# Altium PCB ch340.pcbdoc
Units mil, origin at the board's own origin, x right, y up, seen from the top; angles counter-clockwise.
Board outline 3299.6 x 2085 mil, 2 copper layers (Top Layer, Bottom Layer); 21 components, 21 nets, 69 pads, 87 vias.
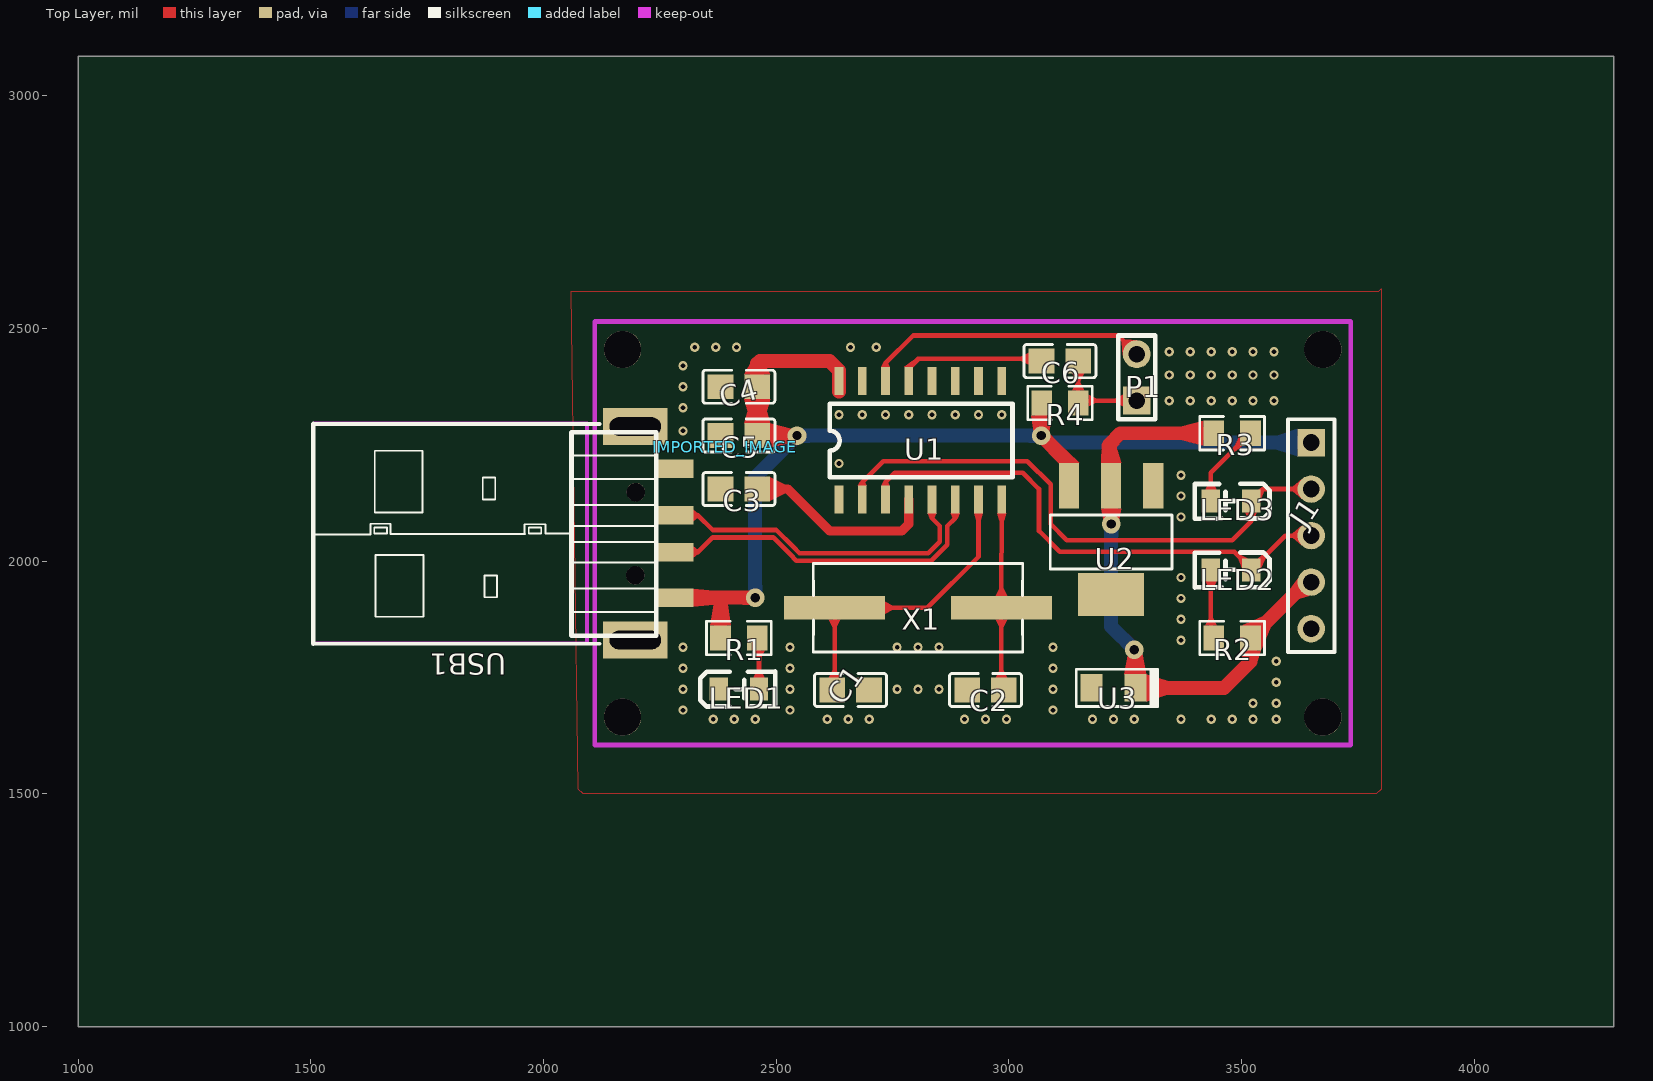
[diagram p0: Top Layer view]
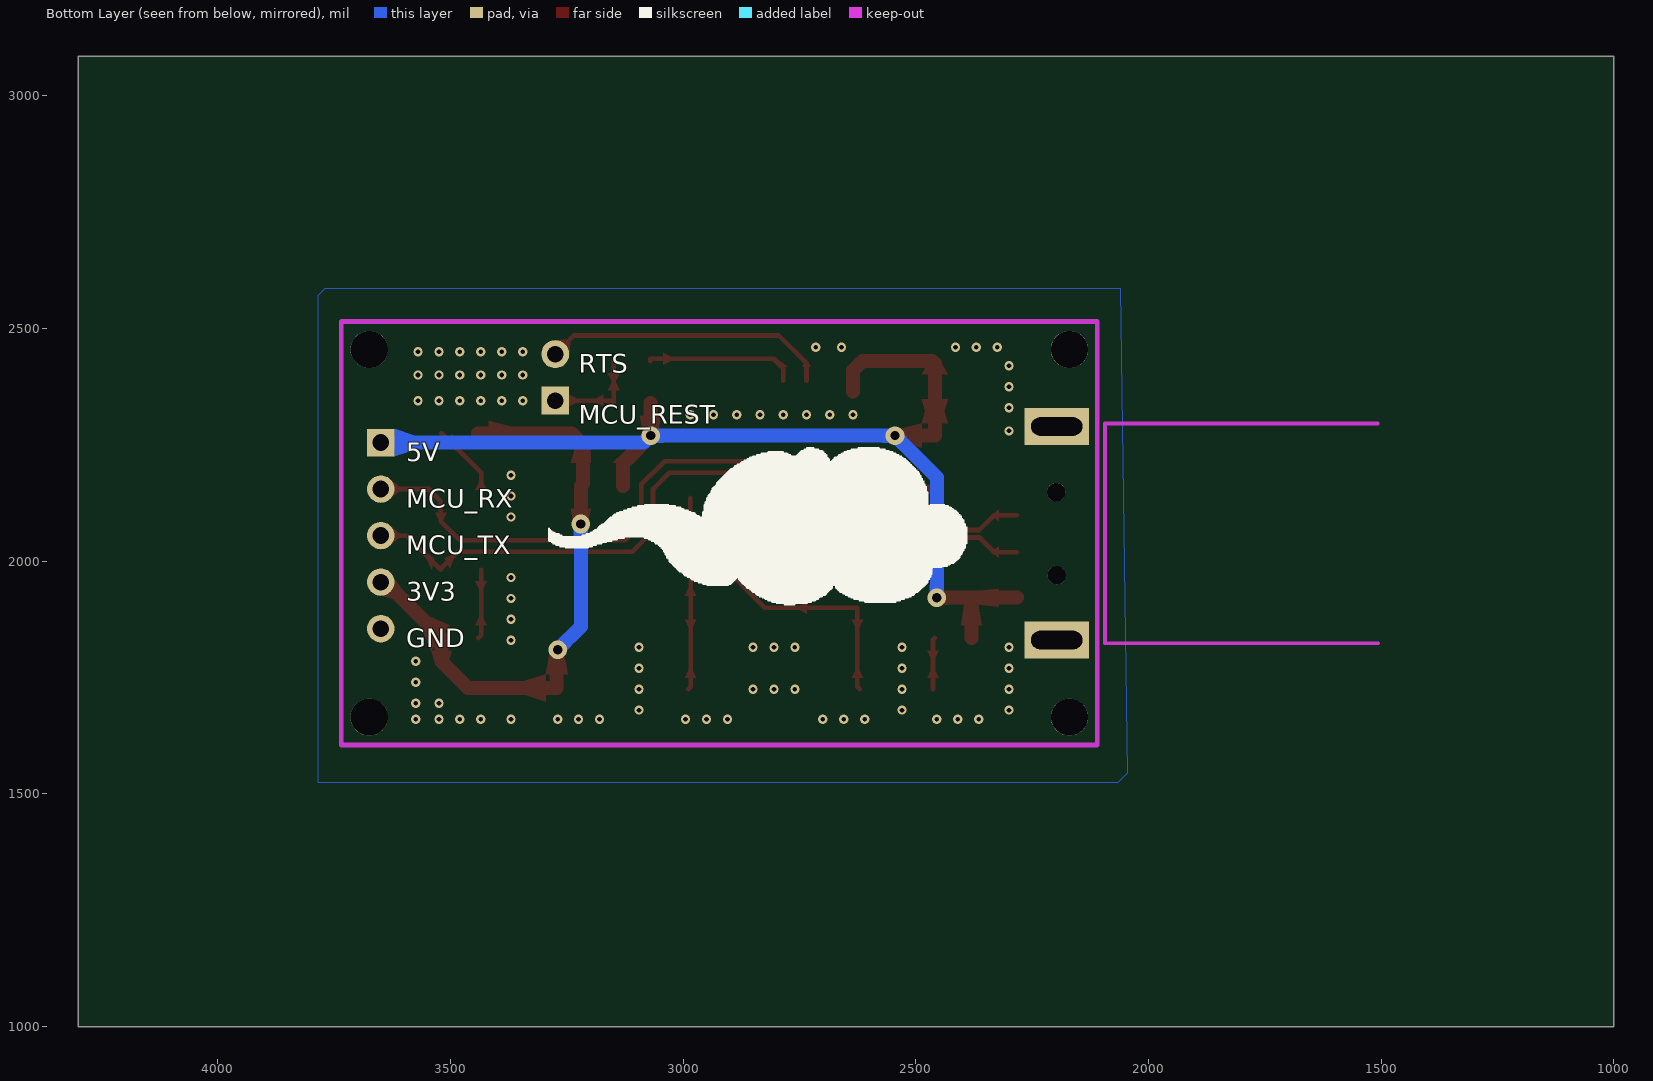
[diagram p1: Bottom Layer view, seen from below]

## Layer stack, top to bottom
Top Layer: signal copper (thickness not stored)
Dielectric: dielectric 12.6, FR-4, Dk 4.8
Bottom Layer: signal copper (thickness not stored)

## Board outline
4299.6,1000 1000,1000 1000,3085 4299.6,3085

## Components (designator, comment, footprint, x,y, rotation, side; value= is the part's Value field where it differs from the comment)
C1 "22p" C0805 2659.6,1723.17 r0 top
C2 "22p" C0805 2949.6,1723.18 r180 top
C3 "0.1u" C0805 2419.6,2155 r180 top
C4 "0.1u" C0805 2419.6,2375 r0 top
C5 "1u" C0805 2419.6,2270 r0 top
C6 "0.1u" C0805 3109.6,2430 r0 top
IMPORTED_IMAGE "IMPORTED_IMAGE" IMPORTED_IMAGE 2389.6,2244.87 r0 top
J1 "HEARDER5" HDR1X5 3649.6,2055 r270 top
LED1 "LED0805" LED0805-RD 2419.6,1725 r0 top
LED2 "LED0805" LED0805-RD 3477.23,1981.37 r180 top
LED3 "LED0805" LED0805-RD 3477.23,2129.03 r180 top
P1 "Header2x1" HEADER2X1 3274.6,2345 r90 top
R1 "1k" R0805 2419.6,1835 r180 top
R2 "750" R0805 3479.6,1835 r0 top
R3 "750" R0805 3479.6,2275 r180 top
R4 "10k" R0805 3109.6,2340 r180 top
U1 "CH340G" SOP16L 2809.6,2260 r90 top
U2 "AMS1117-3.3RG" SOT-223-3_L6.4-W3.5-P2.30-LS7.0-BR 3219.6,2045 r90 top
U3 "22UF" CAP-SMD_L3.2-W1.6-FD-1 3224.6,1727.6 r180 top
USB1 "USB-SMD-A" USB-A-SMD_U-G-04WS-W-01 2239.6,2060 r180 top
X1 "12MHz" HC-49S_L11.4-W4.8 2804.6,1900 r180 top

## Footprints (in the part's own frame and the unit in brackets; to place one, negate y for a bottom-side part, rotate by r counter-clockwise, add the part's x,y. Pads: shape width x height; smd on the part's side, far side on the other; paste and mask are expansions set on the pad)
C0805 [mm]
  rect 1.41x1.35 smd paste-100 mask+0.051: 1(-1,0) 2(1,0)
  silkscreen extent -1.96,-0.9 1.96,0.9
CAP-SMD_L3.2-W1.6-FD-1 [mm]
  rect 1.2x1.5 smd paste+0 mask+0.051: 1(-1.2,0) 2(1.2,0)
  silkscreen extent -2.41,-1.02 2.03,1.02
HC-49S_L11.4-W4.8 [mm]
  rect 5.5x1.3 smd paste+0 mask+0.051: 1(-4.553,0) 2(4.553,0)
  silkscreen extent -5.71,-2.41 5.71,2.41
HDR1X5 [mil]
  rect 59x59 hole 36 paste+0 mask+2: 1(-200,0)
  round 59 hole 36 paste+0 mask+2: 2(-100,0) 3(0,0) 4(100,0) 5(200,0)
  silkscreen extent -250,-50 250,50
HEADER2X1 [mil]
  rect 60x60 hole 36 paste+0 mask+2: 1(0,0)
  round 60 hole 36 paste+0 mask+2: 2(100,0)
  silkscreen extent -40,-40 140,40
IMPORTED_IMAGE [mil]
LED0805-RD [mm]
  rect 1x1.25 smd paste+0 mask+0.051: 1(-1.1,0) 2(1.1,0)
  silkscreen extent -2.1,-0.95 1.98,0.96
R0805 [mil]
  rect 44.59x54.21 smd paste-3937.01 mask+2: 1(-39.37,0) 2(39.37,0)
  silkscreen extent -69,-36 69,36
SOP16L [mm]
  rect 1.52x0.48 smd paste+0 mask+0.051: 1(-3.238,4.445) 2(-3.238,3.175) 3(-3.238,1.905) 4(-3.239,0.635) 5(-3.239,-0.635) 6(-3.239,-1.905) 7(-3.239,-3.175) 8(-3.239,-4.445) 9(3.239,-4.445) 10(3.239,-3.175) 11(3.238,-1.905) 12(3.238,-0.635) 13(3.238,0.635) 14(3.238,1.905) 15(3.238,3.175) 16(3.239,4.445)
  silkscreen extent -2.02,-5.05 1.99,4.95
SOT-223-3_L6.4-W3.5-P2.30-LS7.0-BR [mm]
  rect 2.5x1.1 smd paste+0 mask+0.051: 1(2.97,-2.3) 2(2.97,0) 3(2.97,2.3)
  rect 2.34x3.6 smd paste+0 mask+0.051: 4(-2.97,0)
  silkscreen extent -1.57,-3.33 1.37,3.33
USB-A-SMD_U-G-04WS-W-01 [mm]
  rect 2x1 smd paste-100 mask+0.051: 1(-1.082,3.518) 2(-1.082,1.029) 3(-1.082,-0.978) 4(-1.082,-3.518)
  rect 3.5x2 hole 1 slot 2.8 at 0 deg paste+0 mask+0.051: 5(1.082,5.829) 6(1.082,-5.829)
  round 1 hole 1 unplated paste+0: ""(1.056,-2.248) ""(1.082,2.299)
  Keep-Out Layer lines w0.2: 18.625,5.994 3.715,5.994 3.715,-5.994 18.599,-5.994
  silkscreen extent -0.06,-5.97 18.68,6.03

## Free pads (board coordinates)
  round 80 hole 80 unplated paste+0: ""(2169.6,1665) ""(2169.6,2455) ""(3674.6,1665) ""(3674.6,2455)

## Via types
v1: diameter 20, hole 10, Top Layer to Bottom Layer, tented both sides, 82 vias
v2: diameter 40, hole 20, Top Layer to Bottom Layer, tented both sides, 5 vias

## Nets (pads, with @x,y where several pads share a name; then routed paths per layer and width w, separated by ;. In a path a pad name is that pad's centre, name@x,y a point inside that pad or via, vN(x,y) a via of type N, cw(c..) or ccw(c..) an arc to the next point about the centre after c; other vN are vias at no path point)
3V3: J1.4 R2.2 R3.2 U2.2 U3.1 | length 1283.7
  Top Layer w30: v2(3219.6,2080) U2.2 3214.6,2166.9 3214.6,2250 3239.6,2275 R3.2 ; v2(3269.6,1810) 3271.8,1807.8 U3.1 3462.2,1727.6 3519,1784.4 R2.2 3639,1955 J1.4
  Bottom Layer w30: v2(3219.6,2080) 3219.6,1860 v2(3269.6,1810)
D+: U1.5 USB1.3 | length 710.7
  Top Layer w10: USB1.3 2331.6,2098.5 2363.1,2067 2403.1,2067 2500.2,2067 2536.2,2031 2549.9,2017.3 2826.7,2017.3 2851.6,2042.2 2851.6,2075.6 2834.6,2092.6 U1.5
D-: U1.6 USB1.2 | length 737.2
  Top Layer w10: USB1.2 2331.6,2019.5 2363.1,2051 2403.1,2051 2493.6,2051 2529.6,2015 2543.3,2001.3 2833.3,2001.3 2867.6,2035.6 2867.6,2075.6 2884.6,2092.6 U1.6
DTR: C6.2 P1.1 R4.1 | length 217.7
  Top Layer w10: C6.2 R4.1 3154,2345 P1.1
GND: C1.2 C2.2 C3.2 C4.1 C5.1 J1.5 LED1.1 U1.1 U2.1 U3.2 USB1.4 USB1.5 USB1.6
  other v1: 2364.6,1660 2409.6,1660 2454.6,1660 2609.6,1660 2654.6,1660 2699.6,1660 2904.6,1660 2949.6,1660 2994.6,1660 3179.6,1660 3224.6,1660 3269.6,1660 3369.6,1660 3434.6,1660 3479.6,1660 3524.6,1660 3574.6,1660 2299.6,1680 2529.6,1680 3094.6,1680 3524.6,1695 3574.6,1695 2299.6,1725 2529.6,1725 2759.6,1725 2804.6,1725 2849.6,1725 3094.6,1725 3574.6,1740 2299.6,1770 2529.6,1770 3094.6,1770 3574.6,1785 2299.6,1815 2529.6,1815 2759.6,1815 2804.6,1815 2849.6,1815 3094.6,1815 3369.6,1830 3369.6,1875 3369.6,1920 3369.6,1965 3369.6,2095 3369.6,2140 3369.6,2185 2634.6,2210 2299.6,2280 2634.6,2315 2684.6,2315 2734.6,2315 2784.6,2315 2834.6,2315 2884.6,2315 2934.6,2315 2984.6,2315 2299.6,2330 3344.6,2345 3389.6,2345 3434.6,2345 3479.6,2345 3524.6,2345 3569.6,2345 2299.6,2375 3344.6,2400 3389.6,2400 3434.6,2400 3479.6,2400 3524.6,2400 3569.6,2400 2299.6,2420 3344.6,2450 3389.6,2450 3434.6,2450 3479.6,2450 3524.6,2450 3569.6,2450 2324.6,2460 2369.6,2460 2414.6,2460 2659.6,2460 2714.6,2460
R1_1: LED1.2 R1.1 | length 111.6
  Top Layer w10: R1.1 2462.9,1831.1 LED1.2
R2_1: LED2.2 R2.1 | length 149
  Top Layer w10: LED2.2 3433.9,1841.3 R2.1
R3_1: LED3.2 R3.1 | length 181.3
  Top Layer w10: LED3.2 3433.9,2190 R3.1
RTS: P1.2 U1.14 | length 618.9
  Top Layer w10: U1.14 2734.6,2425 2794.6,2485 3234.6,2485 P1.2
RXD: J1.3 LED2.1 U1.3 | length 1131.9
  Top Layer w10: U1.3 2734.6,2170 2754.6,2190 3029.6,2190 3064.6,2155 3064.6,2065 3109.6,2020 3484.6,2020 3520.5,1984.1 LED2.1 3594.2,2055 J1.3
S$3844: 
S$3872: 
S$3876: 
S$3931: 
TXD: J1.2 LED3.1 U1.2 | length 1212.2
  Top Layer w10: U1.2 2684.6,2170 2729.6,2215 3039.6,2215 3089.6,2165 3089.6,2080 3124.6,2045 3479.6,2045 3520.5,2085.9 LED3.1 3546.5,2155 J1.2
U1_4: C3.1 U1.4 | length 421.6
  Top Layer w20: C3.1 2524.6,2155 2614.6,2065 2769.6,2065 2784.6,2080 U1.4
U1_7: C1.1 U1.7 X1.2 | length 657.8
  Top Layer w10: C1.1@2620.2,1725 2625.3,1730.1 X1.2 2824.6,1900 2934.6,2010 U1.7@2934.6,2135.8
U1_8: C2.1 U1.8 X1.1 | length 413
  Top Layer w10: U1.8@2984.6,2135.8 X1.1 2983.8,1730.1 C2.1@2989,1725
U1_13: C6.1 U1.13 | length 326.4
  Top Layer w10: U1.13 2784.6,2415 2804.6,2435 3070.2,2435 C6.1
U2_4: U2.4
USB_V+: C4.2 C5.2 J1.1 R1.2 R4.2 U1.16 U2.3 USB1.1 | length 2430.6
  Top Layer w30: USB1.1 v2(2454.6,1921.49) ; R1.2 2380.2,1921.5 ; v2(2544.6,2270) C5.2 C4.2 2459,2424.4 2464.6,2430 2614.6,2430 2634.6,2410 U1.16@2634.6,2364.2 ; R4.2 v2(3069.6,2270) 3129,2210.5 U2.3
  Bottom Layer w30: v2(2454.6,1921.49) 2454.6,2180 v2(2544.6,2270) v2(3069.6,2270) 3084.6,2255 J1.1
pads on no net: U1.9 U1.10 U1.11 U1.12 U1.15 USB1.

## Polygon pours and split planes (outlines as drawn)
GND on Bottom Layer (solid): 2059.6,2585 3769.6,2585 3784.6,2570 3784.6,1525 2064.6,1525 2044.6,1545
GND on Top Layer (solid): 2059.6,2580 3794.6,2580 3799.6,2585 3799.6,1510 3789.6,1500 2084.6,1500 2074.6,1510

## Other copper
Top Layer:
  region net 3V3: 3645.92,1925.73 3621.02,1962.31 3607.8,1945.02 3624.99,1919.78
  region net RXD: 3630.08,2032.88 3630.08,2077.12 3609.43,2060 3609.43,2050
  region net TXD: 3630.08,2132.88 3630.08,2177.12 3609.43,2160 3609.43,2150
  region net RTS: 3244.65,2443.12 3276.47,2474.94 3249.25,2477.42 3242.18,2470.34
  region net USB_V+: 2441.37,1906.49 2441.37,1936.49 2427.37,1936.49 2427.37,1906.49
  region net USB_V+: 2531.37,2255 2531.37,2285 2517.37,2285 2517.37,2255
  region net USB_V+: 3084.71,2283.09 3054.72,2283.36 3054.84,2297.36 3084.84,2297.09
  region net USB_V+: 3068.33,2250.04 3089.56,2271.24 3099.45,2261.33 3078.22,2240.13
  region net 3V3: 3234.6,2093.23 3204.6,2093.23 3204.6,2107.23 3234.6,2107.23
  region net 3V3: 3255.72,1795.6 3285.62,1798.03 3286.8,1784.08 3256.8,1781.64
  region net U1_7: 2637.8,1749.75 2612.8,1749.75 2620.3,1764.75 2630.3,1764.75
  region net U1_8: 2996.3,1749.75 2971.3,1749.75 2978.8,1764.75 2988.8,1764.75
  region net U1_4: 2486.72,2130 2486.72,2180 2516.72,2165 2516.72,2145
  region net USB_V+: 2431.21,2401.57 2486.72,2401.57 2473.97,2424.37 2443.97,2424.37
  region net USB_V+: 2486.72,2348.43 2431.21,2348.43 2443.97,2303.43 2473.97,2303.43
  region net USB_V+: 2431.21,2296.57 2486.72,2296.57 2473.97,2341.57 2443.97,2341.57
  region net USB_V+: 2486.72,2296.57 2486.72,2243.43 2531.72,2255 2531.72,2285
  region net R1_1: 2450.41,1749.61 2475.41,1749.61 2467.91,1764.61 2457.91,1764.61
  region net R2_1: 3446.4,1956.76 3421.4,1956.76 3428.9,1941.76 3438.9,1941.76
  region net RXD: 3500.86,1983.79 3512.4,2005.97 3498.98,2012.68 3494.14,2003.38
  region net RXD: 3535.67,2005.97 3540.23,1981.39 3551.12,2004.92 3548.91,2016.84
  region net R3_1: 3421.4,2153.63 3446.4,2153.63 3438.9,2168.63 3428.9,2168.63
  region net TXD: 3532.99,2104.42 3507.99,2104.42 3515.49,2089.42 3525.49,2089.42
  region net TXD: 3535.76,2153.63 3540.23,2129.03 3547.58,2149.02 3542.96,2158.54
  region net DTR: 3244.6,2332.5 3244.6,2357.5 3229.6,2350 3229.6,2340
  region net TXD: 2675.15,2162.43 2694.05,2162.43 2689.6,2170 2679.6,2170
  region net RXD: 2725.14,2162.42 2744.04,2162.42 2739.6,2170 2729.6,2170
  region net D+: 2844.03,2102.57 2825.13,2102.57 2829.6,2092.6 2839.6,2092.6
  region net D-: 2894.03,2102.57 2875.13,2102.57 2879.6,2092.6 2889.6,2092.6
  region net U1_7: 2944.03,2102.57 2925.13,2102.57 2929.6,2087.57 2939.6,2087.57
  region net U1_8: 2994.03,2102.57 2975.13,2102.57 2979.43,2087.57 2989.43,2087.57
  region net U1_13: 2775.14,2417.42 2794.04,2417.34 2808.94,2432.27 2794.86,2432.33
  region net RTS: 2725.14,2417.42 2744.04,2417.42 2739.6,2425 2729.6,2425
  region net USB_V+: 3107.39,2210.76 3150.69,2211.1 3105.03,2255.74 3062.97,2255.41
  region net 3V3: 3197.9,2211.1 3241.3,2211.1 3229.6,2250 3199.6,2250
  region net 3V3: 3241.3,2112.7 3197.9,2112.7 3204.6,2080 3234.6,2080
  region net 3V3: 3295.46,1757.13 3295.46,1698.07 3340.46,1712.6 3340.46,1742.6
  region net 3V3: 3248.21,1757.13 3295.46,1757.13 3286.8,1802.13 3256.8,1802.13
  region net D+: 2321.6,2111 2321.6,2086 2331.6,2093.5 2331.6,2103.5
  region net D-: 2321.6,2032 2321.6,2007 2331.6,2014.5 2331.6,2024.5
  region net USB_V+: 2321.6,1941.2 2321.6,1901.8 2366.6,1906.49 2366.6,1936.49
  region net U1_8: 2971.38,1925.59 2996.38,1925.59 2988.93,1940.59 2978.93,1940.59
  region net U1_8: 2996.3,1874.41 2971.3,1874.41 2978.8,1859.41 2988.8,1859.41
  region net U1_7: 2733.61,1912.5 2733.61,1887.5 2748.61,1895 2748.61,1905
  region net U1_7: 2637.8,1874.41 2612.8,1874.41 2620.3,1859.41 2630.3,1859.41
  region net USB_V+: 2357.93,1862.11 2402.52,1862.11 2395.23,1907.11 2365.23,1907.11
  region net R1_1: 2450.41,1807.89 2475.41,1807.89 2467.91,1792.89 2457.91,1792.89
  region net 3V3: 3541.26,1807.89 3496.68,1807.89 3504,1784.4 3534,1784.4
  region net 3V3: 3501.36,1862.11 3541.26,1807.89 3561.51,1856.3 3543.52,1880.74
  region net R2_1: 3446.4,1862.11 3421.4,1862.11 3428.9,1877.11 3438.9,1877.11
  region net 3V3: 3417.93,2247.89 3417.93,2302.11 3372.93,2290 3372.93,2260
  region net R3_1: 3501.34,2247.89 3496.68,2272.45 3485.87,2248.98 3488.12,2237.1
  region net DTR: 3161.47,2403.43 3136.47,2403.43 3143.97,2388.43 3153.97,2388.43
  region net U1_13: 3042.47,2447.5 3042.47,2422.5 3027.47,2430 3027.47,2440
  region net USB_V+: 3092.52,2312.89 3047.93,2312.89 3054.6,2270.14 3084.6,2270
  region net DTR: 3171.26,2332.5 3171.26,2357.5 3186.26,2350 3186.26,2340
  region net DTR: 3161.47,2367.11 3136.47,2367.11 3143.97,2382.11 3153.97,2382.11
Bottom Layer:
  region net USB_V+: 2469.6,1934.72 2439.6,1934.72 2439.6,1948.72 2469.6,1948.72
  region net USB_V+: 2557.82,2255 2557.82,2285 2571.82,2285 2571.82,2255
  region net USB_V+: 2524.64,2271.25 2545.85,2250.04 2535.95,2240.14 2514.74,2261.35
  region net USB_V+: 3056.37,2255 3056.37,2285 3042.37,2285 3042.37,2255
  region net USB_V+: 3068.34,2250.04 3089.56,2271.25 3095.2,2265.61 3073.99,2244.39
  region net 3V3: 3234.6,2066.77 3204.6,2066.77 3204.6,2052.77 3234.6,2052.77
  region net 3V3: 3249.64,1808.75 3270.85,1829.96 3260.95,1839.86 3239.74,1818.65
  region net USB_V+: 3620.09,2225.5 3620.09,2284.5 3575.09,2270 3575.09,2240

## Silkscreen, mask and mechanical layers (free items; w line width, h text height)
Bottom Overlay:
  text "RTS" at 3224.6,2405 h40
  text "MCU_REST" at 3224.6,2295 h40
  text "5V" at 3594.6,2215 h40
  text "MCU_RX" at 3594.6,2115 h40
  text "MCU_TX" at 3594.6,2015 h40
  text "3V3" at 3594.6,1915 h40
  text "GND" at 3594.6,1815 h40